# Altium PCB motor_control.PcbDoc
Units mil, origin at the board's own origin, x right, y up, seen from the top; angles counter-clockwise.
Board outline 4802.99 x 3444.88 mil, 2 copper layers (Top Layer, Bottom Layer); 151 components, 95 nets, 426 pads, 81 vias.
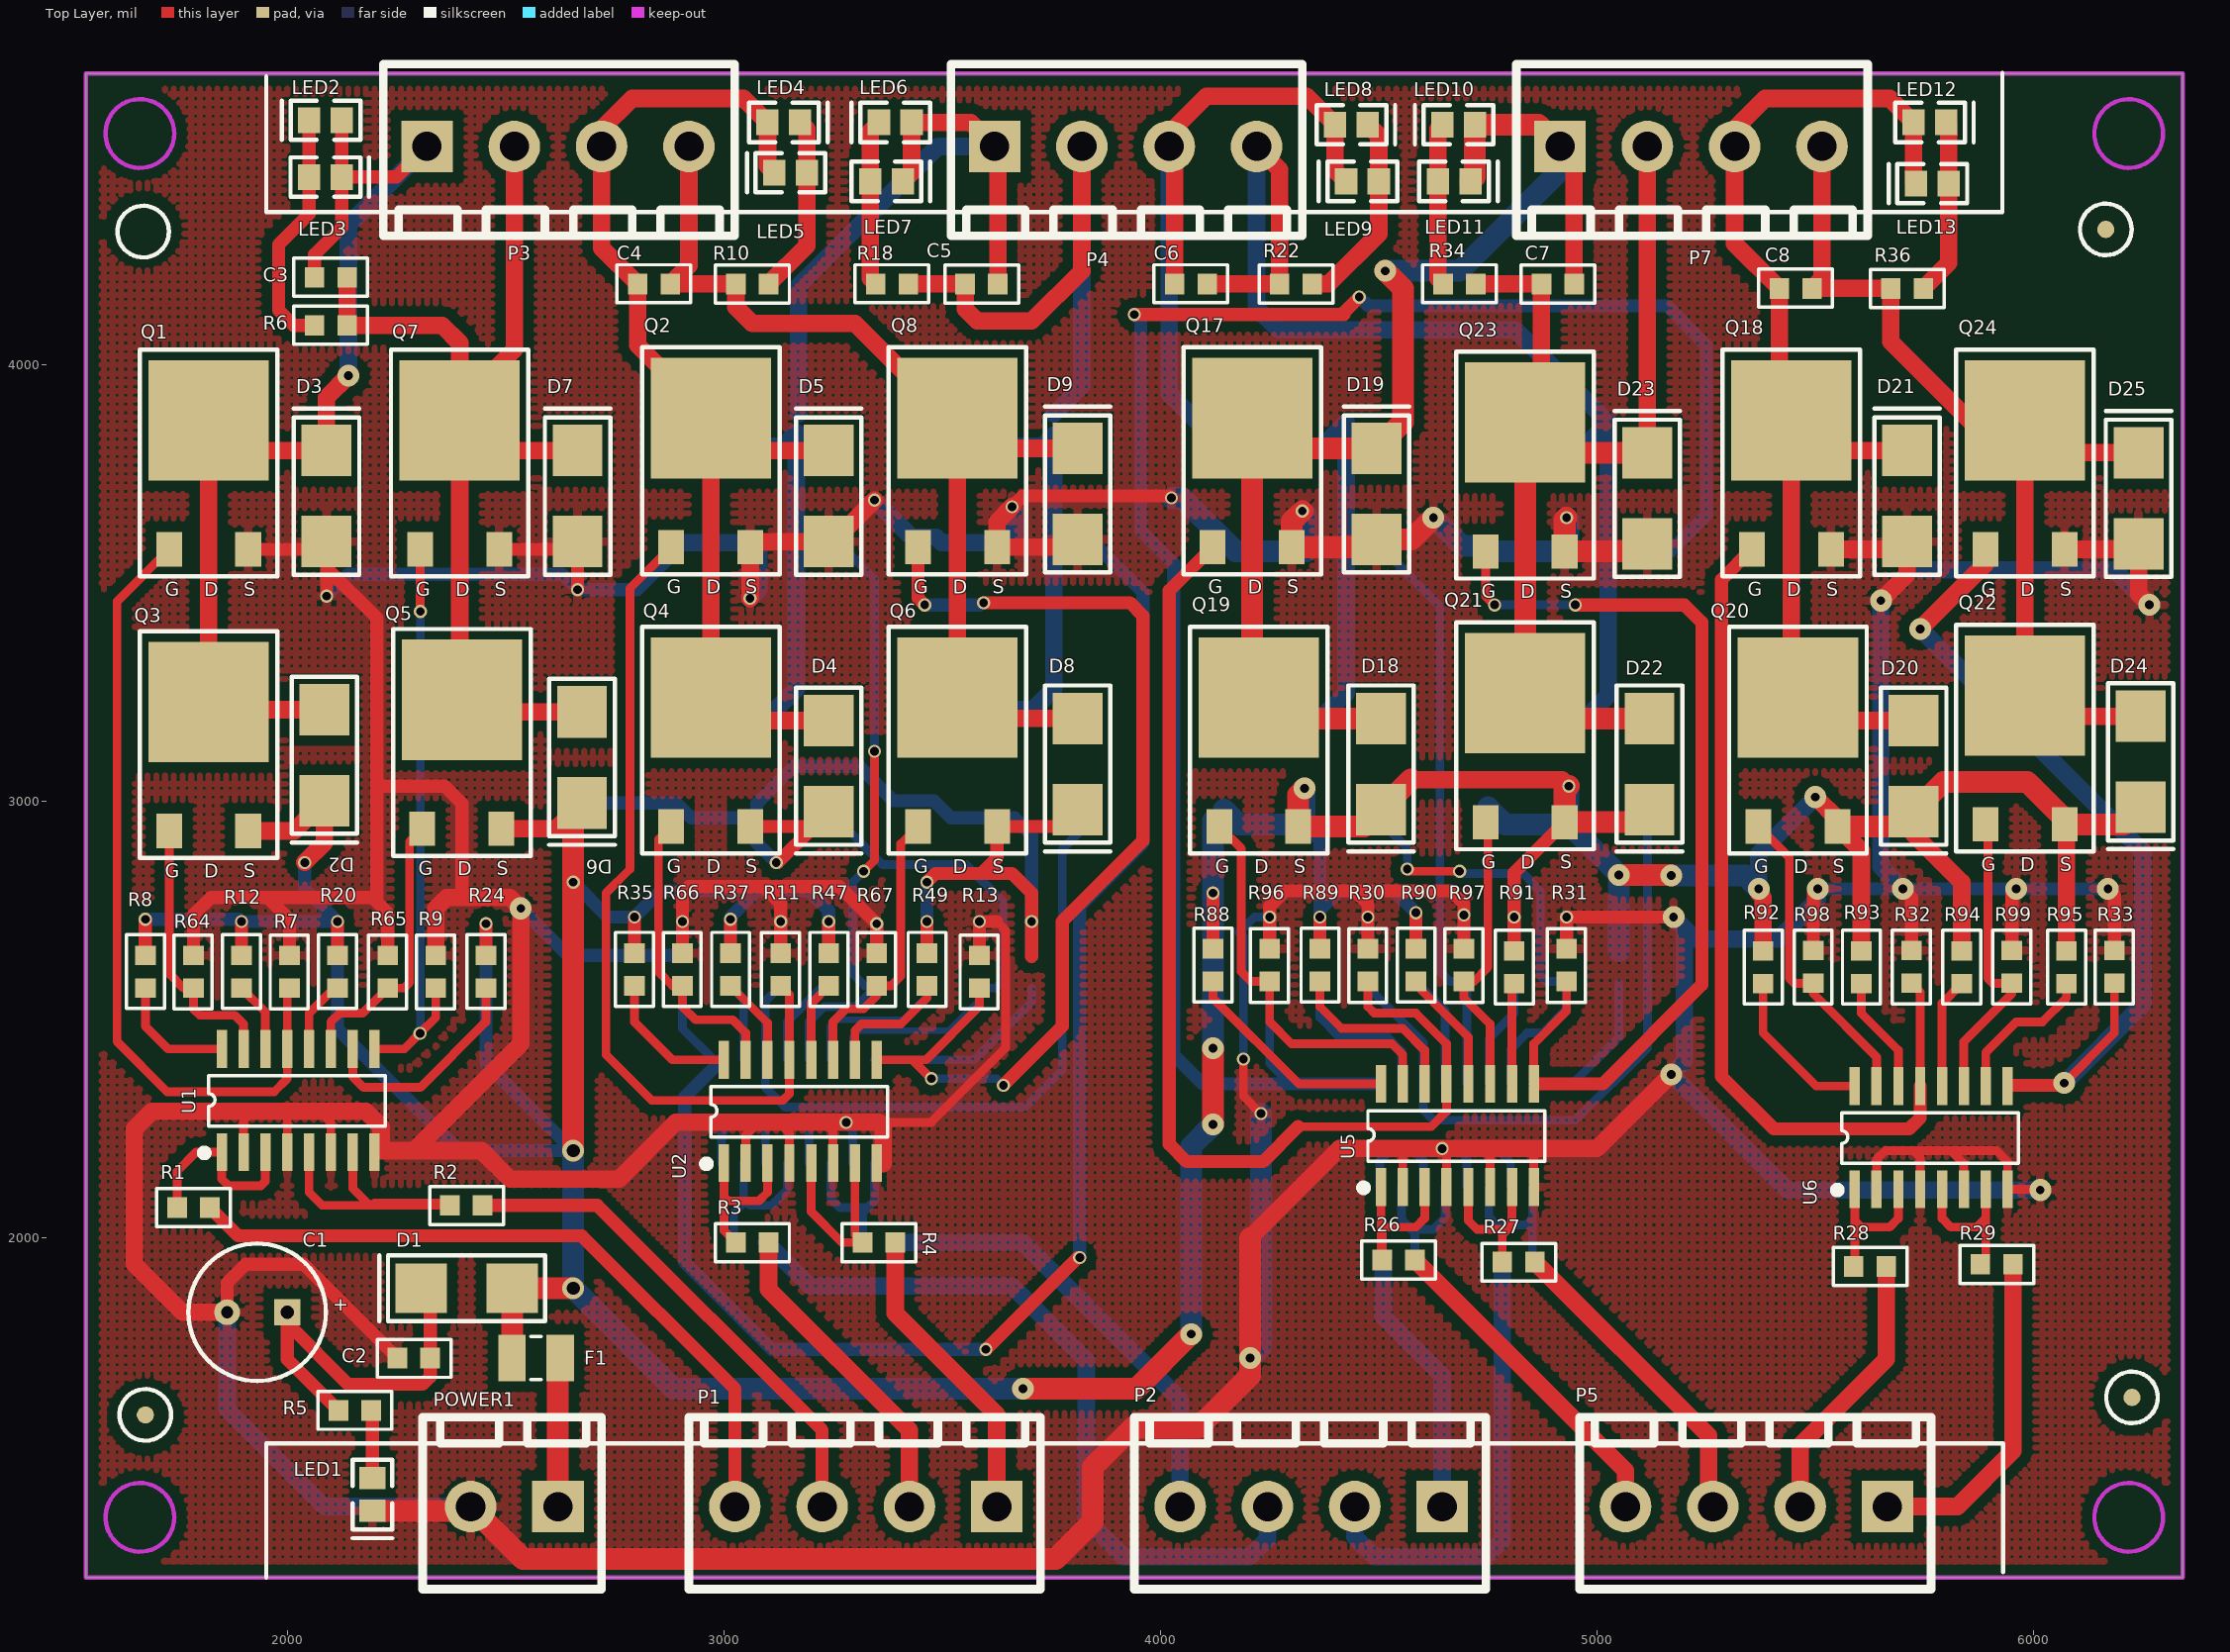
[diagram p0: Top Layer view]
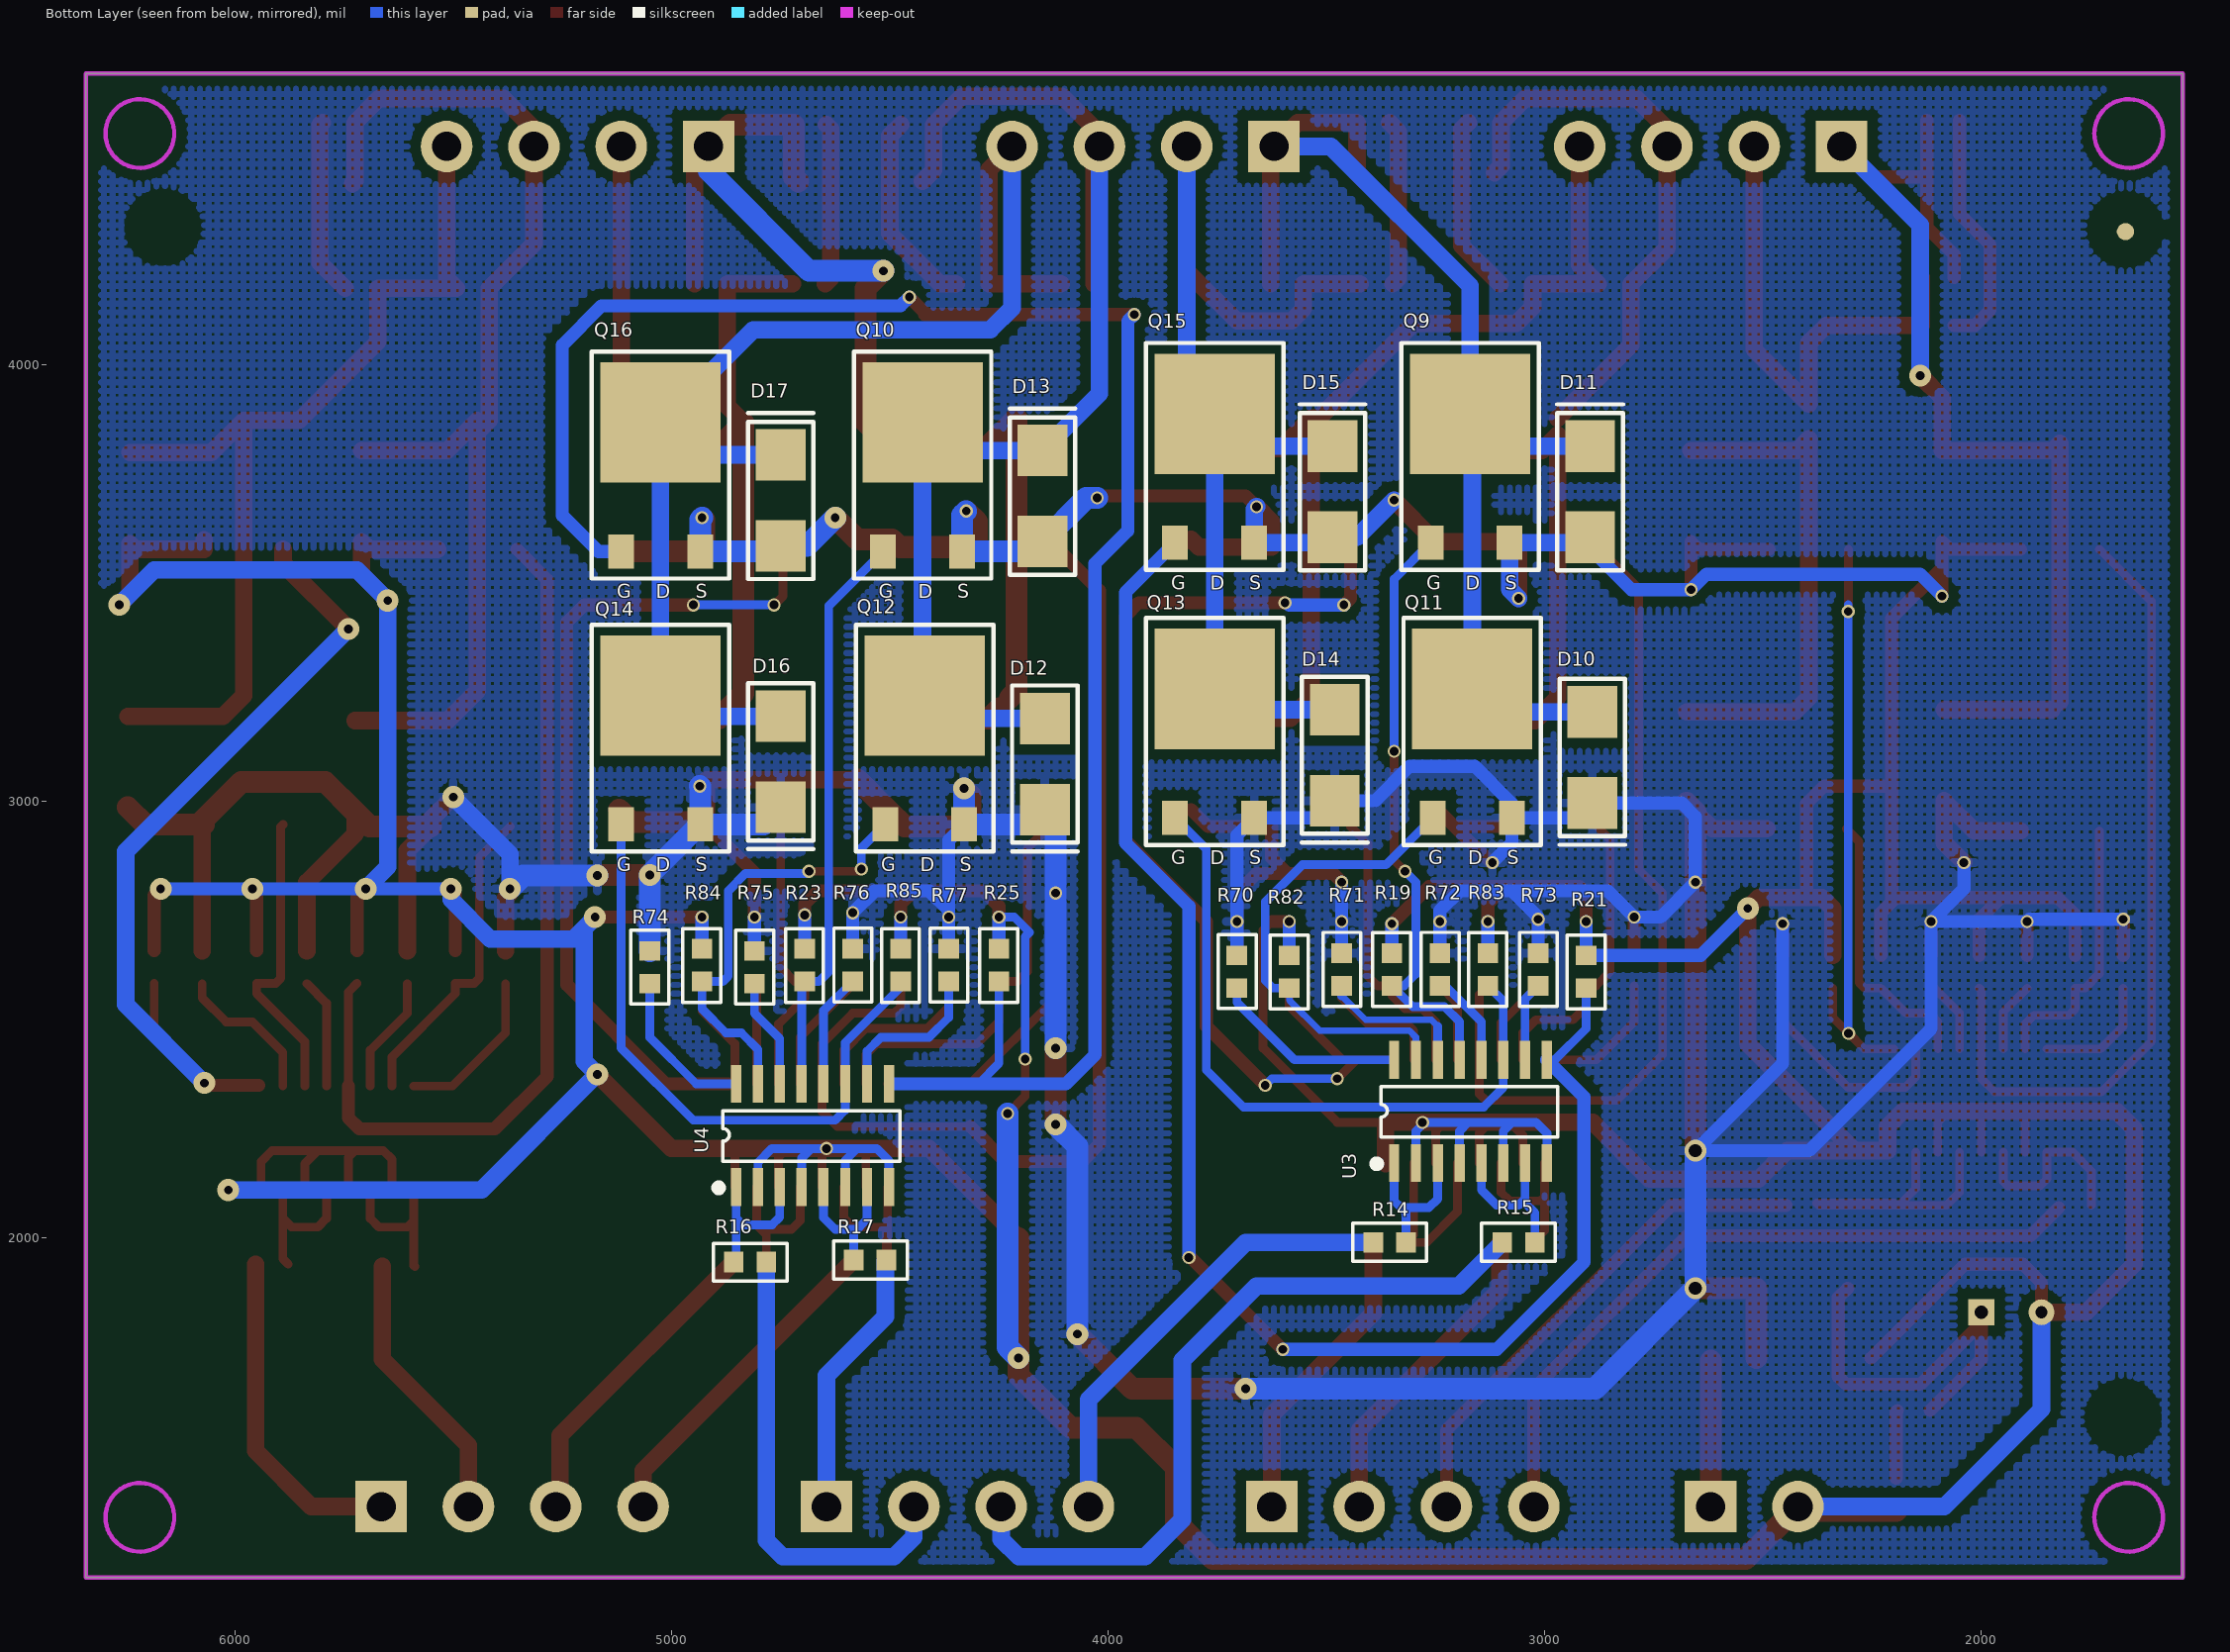
[diagram p1: Bottom Layer view, seen from below]

## Layer stack, top to bottom
Top Solder: solder mask 0.4, Solder Resist, Dk 3.5
Top Layer: signal copper 1.4
Dielectric 1: dielectric 12.6, FR-4, Dk 4.8
Bottom Layer: signal copper 1.4
Bottom Solder: solder mask 0.4, Solder Resist, Dk 3.5

## Board outline
1538.58,1222.56 1538.58,4667.44 6341.57,4667.44 6341.57,1222.56

## Design rules (kind name [scope] priority, off if disabled: settings)
Clearance Clearance_1 [InPolygon] p1: gap=23.62
Clearance [All] p2: gap=10
PolygonConnect [All] p1: connectstyle=Relief reliefconductorwidth=19.68 reliefentries=4 polygonreliefangle="90 Angle" airgapwidth=10
RoutingVias [All] p1: holewidth=28 width=50 viastyle="Through Hole" minholewidth=28 minwidth=50 maxholewidth=28 maxwidth=50
SolderMaskExpansion [All] p1: expansion=4
Width [All] p1: maxlimit=100 minlimit=10 preferedwidth=20
29 further rules are at their usual default settings.

## Components (designator, comment, footprint, x,y, rotation, side; value= is the part's Value field where it differs from the comment)
C1 "Cap Pol3" 220uF 2000,1830 r180 top
C2 "Cap" 0805 2290,1725 r0 top
C3 "Cap" 0805 2100,4200 r180 top
C4 "Cap" 0805 2840,4185 r180 top
C5 "Cap" 0805 3590,4185 r0 top
C6 "Cap" 0805 4070,4185 r180 top
C7 "Cap" 0805 4910,4185 r0 top
C8 "Cap" 0805 5455,4175 r180 top
D1 "1N5822(SS34)" SMA 2515,1885 r180 top
D2 "1N5822(SS34)" SMA 2085,3210 r270 top
D3 "1N5822(SS34)" SMA 2090,3595 r90 top
D4 "1N5822(SS34)" SMA 3240,3185 r270 top
D5 "1N5822(SS34)" SMA 3240,3595 r90 top
D6 "1N5822(SS34)" SMA 2675,3205 r270 top
D7 "1N5822(SS34)" SMA 2665,3595 r90 top
D8 "1N5822(SS34)" SMA 3810,3190 r270 top
D9 "1N5822(SS34)" SMA 3810,3600 r90 top
D10 "1N5822(SS34)" SMA 2891,3205 r270 bottom
D11 "1N5822(SS34)" SMA 2896,3605 r90 bottom
D12 "1N5822(SS34)" SMA 4145,3190 r270 bottom
D13 "1N5822(SS34)" SMA 4150,3595 r90 bottom
D14 "1N5822(SS34)" SMA 3481,3210 r270 bottom
D15 "1N5822(SS34)" SMA 3486,3605 r90 bottom
D16 "1N5822(SS34)" SMA 4750,3195 r270 bottom
D17 "1N5822(SS34)" SMA 4750,3585 r90 bottom
D18 "1N5822(SS34)" SMA 4505,3190 r270 top
D19 "1N5822(SS34)" SMA 4495,3600 r90 top
D20 "1N5822(SS34)" SMA 5725,3185 r270 top
D21 "1N5822(SS34)" SMA 5710,3595 r90 top
D22 "1N5822(SS34)" SMA 5120,3190 r270 top
D23 "1N5822(SS34)" SMA 5115,3590 r90 top
D24 "1N5822(SS34)" SMA 6245,3195 r270 top
D25 "1N5822(SS34)" SMA 6240,3590 r90 top
F1 "Fuse 3A" 3225[1210] 2625,1725 r180 top
LED1 "LED2" LED-0805 2195,1450 r270 top
LED2 "RED" LED-0805 2125,4560 r180 top
LED3 "GRN" LED-0805 2050,4430 r0 top
LED4 "LED2" LED-0805 3100,4555 r0 top
LED5 "LED2" LED-0805 3190,4440 r180 top
LED6 "LED2" LED-0805 3430,4555 r180 top
LED7 "LED2" LED-0805 3335,4420 r0 top
LED8 "LED2" LED-0805 4400,4550 r0 top
LED9 "LED2" LED-0805 4500,4420 r180 top
LED10 "LED2" LED-0805 4720,4550 r180 top
LED11 "LED2" LED-0805 4635,4420 r0 top
LED12 "LED2" LED-0805 5725,4555 r0 top
LED13 "LED2" LED-0805 5805,4415 r180 top
P1 "接PLC" EK508V_PIN4 3625,1385 r180 top locked
P2 "接PLC" EK508V_PIN4 4645,1385 r180 top
P3 "接电机" EK508V_PIN4 2320,4500 r0 top
P4 "接电机" EK508V_PIN4 3620,4500 r0 top
P5 "接PLC" EK508V_PIN4 5665,1385 r180 top
P7 "接电机" EK508V_PIN4 4915,4500 r0 top locked
POWER1 "Header 2" EK508V_PIN2 2520,1385 r180 top
Q1 "FR4105 (NMOS-2)" TO-252 1820,3725 r0 top
Q2 "FR4105 (NMOS-2)" TO-252 2970,3730 r0 top
Q3 "FR5305 (PMOS-2)" TO-252 1820,3080 r0 top
Q4 "FR5305 (PMOS-2)" TO-252 2970,3090 r0 top
Q5 "FR5305 (PMOS-2)" TO-252 2400,3085 r0 top
Q6 "FR5305 (PMOS-2)" TO-252 3535,3090 r0 top
Q7 "FR4105 (NMOS-2)" TO-252 2395,3725 r0 top
Q8 "FR4105 (NMOS-2)" TO-252 3535,3730 r0 top
Q9 "FR4105 (NMOS-2)" TO-252 3171,3740 r180 bottom
Q10 "FR4105 (NMOS-2)" TO-252 4425,3720 r180 bottom
Q11 "FR5305 (PMOS-2)" TO-252 3166,3110 r180 bottom
Q12 "FR5305 (PMOS-2)" TO-252 4420,3095 r180 bottom
Q13 "FR5305 (PMOS-2)" TO-252 3756,3110 r180 bottom
Q14 "FR5305 (PMOS-2)" TO-252 5025,3095 r180 bottom
Q15 "FR4105 (NMOS-2)" TO-252 3756,3740 r180 bottom
Q16 "FR4105 (NMOS-2)" TO-252 5025,3720 r180 bottom
Q17 "FR4105 (NMOS-2)" TO-252 4210,3730 r0 top
Q18 "FR4105 (NMOS-2)" TO-252 5445,3725 r0 top
Q19 "FR5305 (PMOS-2)" TO-252 4225,3090 r0 top
Q20 "FR5305 (PMOS-2)" TO-252 5460,3090 r0 top
Q21 "FR5305 (PMOS-2)" TO-252 4835,3100 r0 top
Q22 "FR5305 (PMOS-2)" TO-252 5980,3095 r0 top
Q23 "FR4105 (NMOS-2)" TO-252 4835,3720 r0 top
Q24 "FR4105 (NMOS-2)" TO-252 5980,3725 r0 top
R1 "Res2" 0805 1785,2070 r0 top
R2 "Res2" 0805 2410,2075 r0 top
R3 "Res2" 0805 3065,1990 r0 top
R4 "Res2" 0805 3355,1990 r0 top
R5 "Res2" 0805 2155,1605 r180 top
R6 "Res2" 0805 2100,4090 r180 top
R7 "Res2" 0805 2005,2610 r270 top
R8 "Res2" 0805 1675,2610 r90 top
R9 "Res2" 0805 2340,2610 r270 top
R10 "Res2" 0805 3065,4185 r0 top
R11 "Res2" 0805 3130,2615 r270 top
R12 "Res2" 0805 1895,2610 r90 top
R13 "Res2" 0805 3585,2610 r270 top
R14 "Res2" 0805 3355,1990 r0 bottom
R15 "Res2" 0805 3060,1990 r0 bottom
R16 "Res2" 0805 4820,1945 r180 bottom
R17 "Res2" 0805 4545,1950 r180 bottom
R18 "Res2" 0805 3385,4185 r180 top
R19 "Res2" 0805 3350,2615 r270 bottom
R20 "Res2" 0805 2115,2610 r90 top
R21 "Res2" 0805 2905,2610 r270 bottom
R22 "Res2" 0805 4310,4185 r0 top
R23 "Res2" 0805 4695,2625 r270 bottom
R24 "Res2" 0805 2455,2610 r90 top
R25 "Res2" 0805 4250,2625 r270 bottom
R26 "Res2" 0805 4545,1950 r0 top
R27 "Res2" 0805 4820,1945 r0 top
R28 "Res2" 0805 5625,1935 r0 top
R29 "Res2" 0805 5915,1940 r0 top
R30 "Res2" 0805 4475,2625 r270 top
R31 "Res2" 0805 4930,2625 r270 top
R32 "Res2" 0805 5720,2621 r270 top
R33 "Res2" 0805 6185,2621 r270 top
R34 "Res2" 0805 4685,4185 r180 top
R35 "Res2" 0805 2795,2615 r90 top
R36 "Res2" 0805 5710,4175 r0 top
R37 "Res2" 0805 3015,2615 r90 top
R47 "Res2" 0805 3240,2615 r90 top
R49 "Res2" 0805 3465,2615 r90 top
R64 "Res2" 0805 1785,2610 r270 top
R65 "Res2" 0805 2230,2610 r270 top
R66 "Res2" 0805 2905,2615 r270 top
R67 "Res2" 0805 3350,2615 r270 top
R70 "Res2" 0805 3705,2610 r90 bottom
R71 "Res2" 0805 3465,2615 r90 bottom
R72 "Res2" 0805 3240,2615 r90 bottom
R73 "Res2" 0805 3015,2615 r90 bottom
R74 "Res2" 0805 5050,2620 r90 bottom
R75 "Res2" 0805 4810,2620 r90 bottom
R76 "Res2" 0805 4585,2625 r90 bottom
R77 "Res2" 0805 4365,2625 r90 bottom
R82 "Res2" 0805 3585,2610 r270 bottom
R83 "Res2" 0805 3130,2615 r270 bottom
R84 "Res2" 0805 4930,2625 r270 bottom
R85 "Res2" 0805 4475,2625 r270 bottom
R88 "Res2" 0805 4120,2625 r90 top
R89 "Res2" 0805 4365,2625 r90 top
R90 "Res2" 0805 4585,2625 r90 top
R91 "Res2" 0805 4810,2620 r90 top
R92 "Res2" 0805 5380,2620 r90 top
R93 "Res2" 0805 5605,2620 r90 top
R94 "Res2" 0805 5835,2620 r90 top
R95 "Res2" 0805 6075,2620 r90 top
R96 "Res2" 0805 4250,2625 r270 top
R97 "Res2" 0805 4695,2625 r270 top
R98 "Res2" 0805 5495,2621 r270 top
R99 "Res2" 0805 5950,2621 r270 top
U1 "TLP280-4" SO16 2025,2315 r90 top
U2 "TLP280-4" SO16 3175,2290 r90 top
U3 "TLP280-4" SO16 3170,2290 r90 bottom
U4 "TLP280-4" SO16 4677.02,2235 r90 bottom
U5 "TLP280-4" SO16 4680,2235 r90 top
U6 "TLP280-4" SO16 5765,2230 r90 top

## Footprints (in the part's own frame and the unit in brackets; to place one, negate y for a bottom-side part, rotate by r counter-clockwise, add the part's x,y. Pads: shape width x height; smd on the part's side, far side on the other; paste and mask are expansions set on the pad)
220uF [mm]
  rect 1.524x1.524 hole 0.762: 1(0,0)
  round 1.5 hole 0.7: 2(3.5,0)
  silkscreen extent -2.25,-4 5.75,4
0805 [mm] "1.14mm,1.2mm,3.05mm"
  rect 1.14x1.2 smd: 1(-0.95,0) 2(0.95,0)
  silkscreen extent -2.13,-1.12 2.16,1.09
3225[1210] [mm] "Chip Resistor; Body 3.2 x 2.5 mm (LxW typ)"
  rect 1.6x2.7 smd: 1(0,0) 2(2.8,0)
  silkscreen extent 1.1,-1.25 1.7,1.25
EK508V_PIN2 [mm]
  rect 3x3 hole 1.7: 1(-2.54,0)
  round 3 hole 1.7: 2(2.54,0)
  silkscreen extent -5.08,-5.2 5.33,4.8
EK508V_PIN4 [mm]
  rect 3x3 hole 1.7: 1(0,0)
  round 3 hole 1.7: 2(5.08,0) 3(10.16,0) 4(15.24,0)
  silkscreen extent -2.54,-5.2 17.91,4.8
LED-0805 [mm]
  rect 1.3x1.5 smd: 1(0,0) 2(1.9,0)
  silkscreen extent -1.08,-1.14 3.49,1.14
SMA [mm]
  rect 3x2.9 smd: 1(0,0) 2(5.3,0)
  silkscreen extent -1.92,-1.91 7.73,1.91
SO16 [mm] "Wide = 6mm"
  rect 2.2x0.6 smd: 1(-3,4.445) 2(-3,3.175) 3(-3,1.905) 4(-3,0.635) 5(-3,-0.635) 6(-3,-1.905) 7(-3,-3.175) 8(-3,-4.445) 9(3,-4.445) 10(3,-3.175) 11(3,-1.905) 12(3,-0.635) 13(3,0.635) 14(3,1.905) 15(3,3.175) 16(3,4.445)
  silkscreen extent -3.23,-5.08 1.45,5.64
TO-252 [mm]
  rect 1.5x2 smd: 1(-2.3,-3.75) 3(2.3,-3.75)
  rect 7x7 smd: 2(0,3.75)
  silkscreen extent -4,-5.32 4,7.87

## Part data
C1: "Polarized Capacitor (Surface Mount)"
C2 C3 C4 C5 C6 C7 C8: "Capacitor"
D1 D2 D3 D4 D5 D6 D7 D8 D9 D10 D11 D12 D13 D14 D15 D16 D17 D18 D19 D20 D21 D22 D23 D24 D25: library part "Diode 1N4148", "High Conductance Fast Diode"
F1: library part "Fuse 1", "Fuse"
LED1 LED4 LED5 LED6 LED7 LED8 LED9 LED10 LED11 LED12 LED13: "Typical RED, GREEN, YELLOW, AMBER GaAs LED"
LED2 LED3: library part LED2, "Typical RED, GREEN, YELLOW, AMBER GaAs LED"
P1 P2 P3 P4 P5 P7: library part "Header 4", "Header, 4-Pin"
POWER1: "Header, 2-Pin"
Q1 Q2 Q7 Q8 Q9 Q10 Q15 Q16 Q17 Q18 Q23 Q24: library part NMOS-2, "N-Channel Power MOSFET"
Q3 Q4 Q5 Q6 Q11 Q12 Q13 Q14 Q19 Q20 Q21 Q22: library part PMOS-2, "P-Channel Power MOSFET"
R1 R2 R3 R4 R5 R6 R7 R8 R9 R10 R11 R12 R13 R14 R15 R16 R17 R18 R19 R20 R21 R22 R23 R24 R25 R26 R27 R28 R29 R30 R31 R32 R33 R34 R35 R36 R37 R47 R49 R64 R65 R66 R67 R70 R71 R72 R73 R74 R75 R76 R77 R82 R83 R84 R85 R88 R89 R90 R91 R92 R93 R94 R95 R96 R97 R98 R99: "Resistor"
U1 U2 U3 U4 U5 U6: library part TLP521-4

## Free pads (board coordinates)
  round 39.37 smd: 0(1675,1595) 0(6165,4310) 0(6225,1635)
  round 39.37 smd far side: 4(1670,4305)

## Via types
v1: diameter 30, hole 20, Top Layer to Bottom Layer, 54 vias
v2: diameter 50, hole 20, Top Layer to Bottom Layer, 25 vias
v3: diameter 50, hole 30, Top Layer to Bottom Layer, 2 vias

## Nets (pads, with @x,y where several pads share a name; then routed paths per layer and width w, separated by ;. In a path a pad name is that pad's centre, name@x,y a point inside that pad or via, vN(x,y) a via of type N, cw(c..) or ccw(c..) an arc to the next point about the centre after c; other vN are vias at no path point)
+24V: D1.1 D2.2 D4.2 D6.2 D8.2 D10.2 D12.2 D14.2 D16.2 D18.2 D20.2 D22.2 D24.2 F1.2 Q3.3 Q4.3 Q5.3 Q6.3 Q11.3 Q12.3 Q13.3 Q14.3 Q19.3 Q20.3 Q21.3 Q22.3 R8.2 R12.2 R20.2 R24.2 R35.2 R37.2 R47.2 R49.2 R70.2 R71.2 R72.2 R73.2 R74.2 R75.2 R76.2 R77.2 R88.2 R89.2 R90.2 R91.2 R92.2 R93.2 R94.2 R95.2 | length 17285.7
  Top Layer w30: R8.2 v1(1675,2730) ; R12.2 v1(1895,2725) ; R20.2 v1(2115,2725) ; R24.2 v1(2455,2720) ; F1.2 F1.2@2515,1725.24 ; R35.2 v1(2795,2735) ; R37.2 v1(3015,2730) ; Q4.3 D4.2@3206.02,2942.36 ; v1(3120,2860) 3123.66,2860 D4.2@3206.02,2942.36 ; R47.2 v1(3240,2725) ; D4.2 D4.2@3206.02,2942.36 ; R49.2 v1(3465,2725) ; v1(3465,2815) 3485,2835 3590,2835 ; 3705,2645 v1(3705,2725) 3705,2790 3660,2835 3590,2835 ; D8.2 3771.02,2942.36 Q6.3 3625.55,2870.55 3590,2835 ; R88.2 v1(4120,2790) ; R89.2 v1(4365,2735) ; R90.2 v1(4585,2745) ; R91.2 v1(4810,2735) 4810,2836.81 Q21.3
  Top Layer w40: Q3.3 2016.02,2932.36 D2.2 2085,2905 v1(2040,2860) ; Q5.3 2616.02,2937.36 D6.2@2655,2976.34 ; 4573.66,3050 4920,3050 v1(4935,3035) ; v2(5370,2800) 5370,2790 5380,2780 R92.2 ; v2(5500,3010) 5550.55,2959.45 Q20.3 5605,2887.91 R93.2 ; D20.2 5725,2925 5835,2815 R94.2 ; R95.2 Q22.3@6075,2942.91
  Top Layer w50: F1.2@2515,1725.24 D1.1 v3(2655,1885) ; v3(2655,2200) v1(2655,2815) 2655,2976.34 D6.2 ; v2(3685,1655) 3945,1655 v2(4070,1780) ; v2(4120,2260) v2(4120,2435) ; v2(4330,3030) 4315.55,3015.55 Q19.3 4466.02,2942.36 D18.2 4573.66,3050 ; v1(4935,3035) 4925.55,3025.55 Q21.3 5091.02,2952.36 D22.2 ; v2(5050,2831.81) 5168.19,2831.81 v2(5170,2830) ; Q20.3 5691.02,2942.36 D20.2 5793.66,3045 5985,3045 6070.55,2959.45 Q22.3 ; Q22.3@6075,2942.91 Q22.3 ; D24.2 6206.02,2947.36 Q22.3
  Bottom Layer w30: v1(1675,2730) 1890,2730 v1(1895,2725) v1(2115,2725) ; v1(2040,2860) 2040,2800 v1(2115,2725) ; v1(2455,2720) 2455,2400 v3(2655,2200) 2395,2200 2115,2480 v1(2115,2725) ; R73.2 v1(3015,2730) 3015,2735 3075,2795 ; v1(3120,2860) 3075.45,2904.55 Q11.3 ; R72.2 v1(3240,2725) 3240,2750 3195,2795 3075,2795 ; R71.2 v1(3465,2725) v1(3465,2815) ; R70.2 v1(3705,2725) 3705,2922.81 Q13.3 3519.98,2962.36 D14.2 3388.66,3001.34 3310,3080 3160,3080 3075.45,2995.45 Q11.3 ; D12.2@4120,2956.34 D12.2 ; Q12.3 4365,2911.81 4365,2750 ; R77.2 v1(4365,2735) 4365,2750 ; R76.2 v1(4585,2745) 4535,2795 4410,2795 4365,2750 ; R75.2 v1(4810,2735) ; 3075,2795 2855,2795 v1(2795,2735) 2735,2735 v1(2655,2815) 2655,2965 2686.34,2996.34 D10.2 2924.98,2962.36 Q11.3
  Bottom Layer w40: v2(5370,2800) 5370,2880 v2(5500,3010)
  Bottom Layer w50: v3(2655,2200) v3(2655,1885) 2885,1655 v2(3685,1655) ; v2(4070,1780) 4070,2210 v2(4120,2260) ; v2(4120,2435) v1(4120,2790) D12.2@4120,2956.34 ; D12.2 4178.98,2947.36 Q12.3 4329.45,3029.45 v2(4330,3030) ; D16.2 4788.98,2947.36 Q14.3 ; v1(4935,3035) 4934.45,3034.45 Q14.3 ; R74.2 v2(5050,2831.81) Q14.3 ; v2(5170,2830) 5340,2830 v2(5370,2800)
+24VIN: F1.1 POWER1.1 | length 342.1
  Top Layer w30: F1.1@2620,1720 F1.1
  Top Layer w50: POWER1.1 F1.1@2620,1720
A1: C3.2 D2.1 D3.2 LED2.1 LED3.2 P3.1 Q1.2 Q3.2 | length 2543.1
  Top Layer w30: Q3.2 Q3.2@1837.64,3210 ; C3.2 2062.6,4252.6 2124.8,4314.8 LED3.2 ; LED2.1 2124.8,4559.8 LED3.2 ; P3.1 2250,4430 LED3.2
  Top Layer w40: Q3.2 1820,3820 1836.34,3803.66 D3.2 2090,3925 v2(2140,3975) ; Q3.2@1837.64,3210 D2.1
  Bottom Layer w40: v2(2140,3975) 2140,4320 P3.1
A2: C4.2 D4.1 D5.2 LED4.1 LED5.2 P3.3 Q2.2 Q4.2 | length 2498.2
  Top Layer w40: Q2.2 2802.6,4045.04 C4.2 2720,4267.6 P3.3 2720,4540 2790,4610 3045,4610 LED4.1 3100,4455.2 LED5.2 ; D4.1 3022.64,3185 Q4.2 2970,3840 3006.34,3803.66 D5.2
A3: C5.2 D10.1 D11.2 LED6.1 LED7.2 P4.1 Q9.2 Q11.2 | length 2715.9
  Top Layer w40: LED7.2 3430,4440.2 LED6.1 3565,4555 P4.1 3627.4,4492.6 C5.2
  Bottom Layer w40: D10.1 3113.36,3205 Q11.2 3166,3845 3134.66,3813.66 D11.2 ; Q9.2 3171,4181 3490,4500 P4.1
A4: C6.2 D12.1 D13.2 LED8.1 LED9.2 P4.3 Q10.2 Q12.2 | length 2908.3
  Top Layer w40: C6.2 4032.6,4487.4 P4.3 4020,4530 4105,4615 4335,4615 LED8.1 4400,4445.2 LED9.2
  Bottom Layer w40: P4.3 4020,3933.66 D13.2 4361.02,3803.66 Q10.2 4425,3247.64 Q12.2 4367.36,3190 D12.1
A5: C7.2 D18.1 D19.2 LED10.1 LED11.2 P7.1 Q17.2 Q19.2 | length 2902.2
  Top Layer w40: P7.1 4947.4,4467.6 C7.2
  Top Layer w50: Q19.2 4210,3252.64 Q17.2 4278.98,3808.66 D19.2 4555,3868.66 4555,4175 v2(4515,4215) ; Q19.2@4248.82,3213.82 4272.64,3190 D18.1 ; LED11.2 4720,4430.2 LED10.1 4865,4550 P7.1
  Bottom Layer w50: v2(4515,4215) 4685,4215 4915,4445 P7.1
A6: C8.2 D20.1 D21.2 LED12.1 LED13.2 P7.3 Q18.2 Q20.2 | length 2574.4
  Top Layer w40: D21.2 5513.98,3803.66 Q18.2 Q18.2@5445,3845 ; D20.1 5512.64,3185 Q20.2 5445,3252.64 Q18.2@5445,3845 ; LED13.2 5725,4420.2 LED12.1 5670,4610 5385,4610 5315,4540 P7.3 5315,4277.6 C8.2 5417.6,3872.4 Q18.2@5445,3845
B1: C3.1 D6.1 D7.2 P3.2 Q5.2 Q7.2 R6.1 | length 2332.7
  Top Layer w40: C3.1 R6.1 2355,4090 2395,4050 2395,3910 2520,4035 P3.2 ; D7.2 2421.34,3803.66 2395,3830 2395,3237.64 Q5.2 2427.64,3205 D6.1
B2: C4.1 D8.1 D9.2 P3.4 Q6.2 Q8.2 R10.1 | length 2386.7
  Top Layer w40: P3.4 2920,4227.6 C4.1 R10.1 3027.6,4132.4 3065,4095 3300,4095 3517.36,3877.64 Q8.2 ; D8.1 3582.64,3190 Q6.2 Q8.2 ; D9.2 3603.98,3808.66 Q8.2
B3: C5.1 D14.1 D15.2 P4.2 Q13.2 Q15.2 R18.1 | length 2596.1
  Top Layer w40: R18.1 C5.1 3552.6,4127.4 3580,4100 3705,4100 3820,4215 P4.2
  Bottom Layer w40: D14.1 3708.36,3210 Q13.2 3756,3840 3729.66,3813.66 D15.2 ; Q15.2 3820,3951.64 P4.2
B4: C6.1 D16.1 D17.2 P4.4 Q14.2 Q16.2 R22.1 | length 3011
  Top Layer w40: C6.1 R22.1 4272.6,4447.4 P4.4
  Bottom Layer w40: P4.4 4220,4130 4270,4080 4812.64,4080 Q16.2 ; D16.1 4977.36,3195 Q14.2 Q16.2 ; D17.2 4951.02,3793.66 Q16.2
B5: C7.1 D22.1 D23.2 P7.2 Q21.2 Q23.2 R34.1 | length 2421.9
  Top Layer w40: R34.1 C7.1 4872.6,3905.24 Q23.2 ; D23.2 P7.2
  Top Layer w50: D23.2 4903.98,3798.66 Q23.2 Q21.2 4892.64,3190 D22.1
B6: C8.1 D24.1 D25.2 P7.4 Q22.2 Q24.2 R36.1 | length 2224.4
  Top Layer w40: P7.4 5515,4197.6 C8.1 R36.1 5672.6,4052.4 5852.36,3872.64 Q24.2 ; D25.2 6053.98,3798.66 Q24.2 ; D24.1 6027.64,3195 Q22.2 Q24.2
GND: C1.2 C2.1 D3.1 D5.1 D7.1 D9.1 D11.1 D13.1 D15.1 D17.1 D19.1 D21.1 D23.1 D25.1 LED1.2 POWER1.2 Q1.3 Q2.3 Q7.3 Q8.3 Q9.3 Q10.3 Q15.3 Q16.3 Q17.3 Q18.3 Q23.3 Q24.3 R7.1 R9.1 R11.1 R13.1 R19.1 R21.1 R23.1 R25.1 R30.1 R31.1 R32.1 R33.1 R64.1 R65.1 R66.1 R67.1 R82.1 R83.1 R84.1 R85.1 R96.1 R97.1 R98.1 R99.1 U1.2 U1.4 U1.6 U1.8 U2.2 U2.4 U2.6 U2.8 U3.2 U3.4 U3.6 U3.8 U4.2 U4.4 U4.6 U4.8 U5.2 U5.4 U5.6 U5.8 U6.2 U6.4 U6.6 U6.8 | length 28616.2
  Top Layer w20: U1.2 1900,2270 1920,2290 ; 1985,2290 2000,2275 U1.4 ; 2075,2290 2100,2265 U1.6 ; U2.2 3050,2235 3080,2265 ; 3125,2265 3150,2240 U2.4 ; 3230,2265 3250,2245 U2.6 ; 3355,2265 3475,2265 3645,2435 3645,2705 3625,2725 ; v1(4190,2410) 4190,2325 v1(4230,2285) ; U5.2 4555,2190 4570,2205 ; U5.4 4655,2190 ; 4735,2205 4755,2185 U5.6 ; 4840,2205 4855,2190 U5.8 ; U6.2 5640,2180 5660,2200 5725,2200 ; U6.4 5740,2185 5725,2200 ; U6.6 5840,2170 5810,2200 ; v2(6015,2110) 6013.11,2111.89 U6.8 5940,2175 5915,2200 5810,2200 ; 5725,2200 5810,2200
  Top Layer w30: R64.1 1785,2740 1825,2780 1955,2780 ; C1.2 1862.2,1897.2 1905,1940 2037.6,1940 C2.1 ; Q1.3 2072.36,3577.36 D3.1 2090,3535 ; R7.1 2005,2730 1955,2780 ; v1(2090,3470) 2090,3535 ; 2205,2780 2205,3035 ; R65.1 2230,2745 2195,2780 1955,2780 ; 2400,2780 2400,2995 2360,3035 2205,3035 ; POWER1.2@2410.2,1375.2 POWER1.2 ; Q7.3 2647.36,3577.36 D7.1 v1(2665,3485) ; R66.1 v1(2905,2725) 2905,2790 2920,2805 3090,2805 ; R11.1 v1(3130,2725) 3130,2765 3090,2805 ; R67.1 v1(3350,2720) 3265,2805 3090,2805 ; R13.1 v1(3585,2725) 3625,2725 ; v1(3660,3675) 3685,3700 4020,3700 v1(4025,3695) ; R96.1 v1(4250,2735) 4250,2760 4285,2795 4445,2795 ; R30.1 v1(4475,2735) 4475,2765 4445,2795 ; R97.1 v1(4695,2740) 4695,2765 4665,2795 4445,2795 ; R31.1 v1(4930,2735) v2(5175,2735) v2@5185,2735 ; R98.1 5495,2790 v2(5505,2800) ; v2(5700,2800) 5720,2780 R32.1 ; R99.1 5950,2790 v2(5960,2800) ; v2(6170,2800) 6185,2785 R33.1 ; 2090,3535 2205,3420 2205,3035
  Top Layer w40: C1.2 1760,1830 1650,1940 1650,2250 1690,2290 1920,2290 1985,2290 2075,2290 2180,2290 2215,2255 2215,2200 2290,2200 ; R9.1 2340,2755 2365,2780 2400,2780 2510,2780 v2(2535,2755) 2535,2445 2290,2200 ; v1(3060,3465) 3060.55,3465.55 Q2.3 3073.19,3595 D5.1 3250,3595 v1(3345,3690) ; 3365,2170 3365,2255 3355,2265 v1(3280,2265) 3230,2265 3125,2265 3080,2265 2890,2265 2760,2135 2510,2135 2445,2200 2290,2200 ; v1(3660,3675) 3625.55,3640.55 Q8.3 3792.36,3582.36 D9.1 ; 4205,2000 4410,2205 4570,2205 v1(4645,2205) 4735,2205 4840,2205 5000,2205 v2(5170,2375) ; D23.1@5097.36,3572.36 D23.1 ; Q18.3 5692.36,3577.36 D21.1 5710,3520 v2(5650,3460) ; Q24.3@6070.55,3599.45 Q24.3 6227.36,3577.36 D25.1 6240,3475 v2(6265,3450)
  Top Layer w50: LED1.2 POWER1.2@2410.2,1375.2 ; POWER1.2 2540,1265 3760,1265 3845,1350 3845,1475 3935,1565 4085,1565 4205,1685 v2(4205,1725) 4205,2000 ; v1(4325,3665) 4300.55,3640.55 Q17.3 4477.36,3582.36 D19.1 4575,3600 v2(4625,3650) ; v1(4930,3650) 4925.55,3645.55 Q23.3 D23.1@5097.36,3572.36
  Bottom Layer w20: U3.8 2995,2240 3020,2265 3075,2265 ; U3.6 3095,2245 3075,2265 ; U3.4 3195,2245 3175,2265 ; v1@3275,2265 3175,2265 ; v1@3277.5,2262.5 3295,2245 U3.2 ; v1(4190,2410) 4190,2690 4180,2700 4215,2735 v1(4250,2735) ; U4.8 4502.02,2177.02 4530,2205 4575,2205 ; U4.6 4602.02,2177.98 4575,2205 ; U4.4 4702.02,2182.98 4680,2205 ; U4.2 4802.02,2172.98 4770,2205 4680,2205 ; 3075,2265 3175,2265 ; 4575,2205 v1(4645,2205) 4680,2205
  Bottom Layer w30: v1(2090,3470) 2140,3520 2630,3520 v1(2665,3485) 2801.28,3485 D11.1@2908.64,3592.36 ; v2(2535,2755) 2642.6,2647.4 R21.1 v1(2905,2725) ; R83.1 v1(3130,2725) ; R19.1 v1(3350,2720) ; R82.1 v1(3585,2725) ; R25.1 v1(4250,2735) ; R85.1 v1(4475,2735) ; R23.1 v1(4695,2740) ; R84.1 v1(4930,2735) ; v2(5505,2800) v2(5700,2800) v2(5960,2800) v2(6170,2800)
  Bottom Layer w40: C1.2 1862.2,1607.8 2085,1385 POWER1.2 ; D11.1@2908.64,3592.36 Q9.3 3080.45,3485.45 v1(3060,3465) ; v1(3345,3690) 3430,3605 D15.1 3498.64,3592.36 Q15.3 3665.45,3669.55 v1(3660,3675) ; v2(5175,2735) 5200,2710 ; v2(5505,2800) 5505,2775 5415,2685 5225,2685 5200,2710 ; v2(5700,2800) 5650,2850 v2(5650,3460) 5720,3530 6185,3530 v2(6265,3450) ; v2(6015,2110) 5435,2110 v2(5170,2375) 5200,2405 5200,2710
  Bottom Layer w50: v1(4025,3695) 4050,3695 D13.1 4172.64,3572.36 Q10.3 4334.45,3655.55 v1(4325,3665) ; v2(4205,1725) 4230,1750 v1(4230,2285) ; v2(4625,3650) 4690,3585 D17.1 4762.64,3572.36 Q16.3 4934.45,3645.55 v1(4930,3650)
M1A: P1.4 R1.2 | length 1644.5
  Top Layer w30: R1.2 1887.4,2005 2675,2005 3025,1655 P1.4
M1B: P1.3 R2.2 | length 1165.9
  Top Layer w30: R2.2 2710,2075 3225,1560 P1.3
M2A: P1.2 R3.2 | length 738.6
  Top Layer w40: R3.2 3102.4,1882.6 3425,1560 P1.2
M2B: P1.1 R4.2 | length 701.3
  Top Layer w40: R4.2 3392.4,1827.6 3625,1595 P1.1
M3A: P2.4 R14.2 | length 1046.7
  Bottom Layer w40: R14.2 3685,1990 4045,1630 P2.4
M3B: P2.3 R15.2 | length 1751.2
  Bottom Layer w40: R15.2 3197.4,1890 3660,1890 3830,1720 3830,1355 3915,1270 4205,1270 4245,1310 P2.3
M4A: P2.2 R16.2 | length 1079.2
  Bottom Layer w40: P2.2 4445,1315 4490,1270 4745,1270 4782.6,1307.6 R16.2
M4B: P2.1 R17.2 | length 621.9
  Bottom Layer w40: R17.2 4510,1947.6 4510,1820 4645,1685 P2.1
M5A: P5.4 R26.2 | length 764.9
  Top Layer w40: R26.2 5065,1467.4 P5.4
M5B: P5.3 R27.2 | length 728.8
  Top Layer w40: R27.2 5255,1547.4 5255,1395 P5.3
M6A: P5.2 R28.2 | length 631.8
  Top Layer w40: P5.2 5465,1525 5662.4,1722.4 R28.2
M6B: P5.1 R29.2 | length 767.8
  Top Layer w40: P5.1 5825,1385 5952.4,1512.4 R29.2
NetC1_1: C1.1 C2.2 D1.2 R5.2 | length 877.6
  Top Layer w30: C1.1 C1.1@2000,1805 ; R5.2 2000,1722.6 C1.1@2000,1805 ; D1.2 2327.4,1863.94 C2.2 2327.4,1682.4 2310,1665 2140,1665 C1.1@2000,1805
NetLED1_1: LED1.1 R5.1 | length 156.1
  Top Layer w30: R5.1 2195,1602.4 LED1.1
NetLED2_2: LED2.2 LED3.1 R6.2 | length 561.2
  Top Layer w30: LED2.2 2050.2,4430.2 LED3.1 2050,4345 1980,4275 1980,4125 2015,4090 R6.2
NetLED4_2: LED4.2 LED5.1 R10.2 | length 412.6
  Top Layer w40: R10.2 3190,4272.6 LED5.1 3190,4539.8 LED4.2
NetLED6_2: LED6.2 LED7.1 R18.2 | length 383.6
  Top Layer w40: R18.2 3335,4197.6 LED7.1 3335,4534.8 LED6.2
NetLED8_2: LED8.2 LED9.1 R22.2 | length 460.7
  Top Layer w40: R22.2 4385,4185 4500,4300 LED9.1 4500,4524.8 LED8.2
NetLED10_2: LED10.2 LED11.1 R34.2 | length 374.4
  Top Layer w40: LED10.2 4635,4539.8 LED11.1 4635,4197.6 R34.2
NetLED12_2: LED12.2 LED13.1 R36.2 | length 406
  Top Layer w40: R36.2 5805,4232.6 LED13.1 5805,4549.8 LED12.2
NetQ1_1: Q1.1 R7.2 U1.13 | length 1836.6
  Top Layer w20: Q1.1 1610,3457.91 1610,2450 1725,2335 1970,2335 2000,2365 U1.13 2000,2567.6 R7.2
NetQ2_1: Q2.1 R11.2 U2.13 | length 1949.9
  Top Layer w20: Q2.1 2785,3487.91 2785,2845 2730,2790 2730,2420 2835,2315 3135,2315 3150,2330 U2.13 3150,2557.6 R11.2
NetQ3_1: Q3.1 R64.2 U1.15 | length 630
  Top Layer w20: Q3.1 1730,2931.81 1730,2605 1762.4,2572.6 R64.2 1785,2525 1800,2510 1880,2510 1900,2490 U1.15
NetQ4_1: Q4.1 R66.2 U2.15 | length 692.3
  Top Layer w20: Q4.1 2850,2912.91 2850,2610 2882.4,2577.6 R66.2 2905,2530 2935,2500 3020,2500 3050,2470 U2.15
NetQ5_1: Q5.1 R65.2 U1.11 | length 643.7
  Top Layer w20: U1.11 2100,2495 2120,2515 2172.4,2515 R65.2 2267.6,2572.6 2280,2585 2280,2907.91 Q5.1
NetQ6_1: Q6.1 R67.2 U2.11 | length 657.3
  Top Layer w20: U2.11 3250,2495 3280,2525 3320,2525 3350,2555 R67.2 3382.6,2577.6 3405,2600 3405,2902.91 Q6.1
NetQ7_1: Q7.1 R9.2 U1.9 | length 1376.3
  Top Layer w20: U1.9 2268.11,2433.11 v1(2304.05,2469.05) 2340,2505 R9.2 ; Q7.1 2304.45,3450.55 2305,3450 v1(2305,3435)
  Bottom Layer w20: v1(2304.05,2469.05) 2305,2470 2305,3450 v1(2305,3435)
NetQ8_1: Q8.1 R13.2 U2.9 | length 2409
  Top Layer w20: U2.9 3431.89,2408.11 ; v1(3475,2365) 3431.89,2408.11 ; R13.2 3585,2530 3463.11,2408.11 3431.89,2408.11
  Top Layer w30: Q8.1 3444.45,3465.55 v1(3460,3450) ; v1(3595,3455) 3930,3455 3960,3425 3960,2910 3775,2725 3775,2485 v1(3640,2350)
  Bottom Layer w20: v1(3475,2365) 3625,2365 v1(3640,2350)
  Bottom Layer w30: v1(3460,3450) v1@3585,3450
NetQ9_1: Q9.1 R19.2 U3.13 | length 1385.1
  Top Layer w20: v1(3320,2840) 3345,2865 v1(3345,3115)
  Bottom Layer w20: U3.13 3195,2495 3230,2530 3302.4,2530 R19.2 3322.4,2577.6 3295,2605 3295,2815 v1(3320,2840) ; Q9.1 3345,3508.91 v1(3345,3115)
NetQ10_1: Q10.1 R23.2 U4.13 | length 1315.6
  Bottom Layer w20: Q10.1 4640,3447.91 4640,2610 4662.4,2587.6 R23.2 4702.02,2580.57 U4.13
NetQ11_1: Q11.1 R82.2 U3.15 | length 1123.9
  Bottom Layer w15: U3.15 3295,2460 3310,2475 3515,2475 3585,2545 R82.2
  Bottom Layer w20: Q11.1@3256.55,2948.45 Q11.1 3363.91,2855 3555,2855 3640,2770 3640,2590 3622.6,2572.6 R82.2
NetQ12_1: Q12.1 R84.2 U4.15 | length 1018.8
  Top Layer w20: v1(4565,2845) 4570,2840 v1(4685,2840)
  Bottom Layer w20: Q12.1 4565,2892.91 v1(4565,2845) ; v1(4685,2840) 4690,2835 4830,2835 4870,2795 4870,2600 4882.4,2587.6 R84.2 4930,2525 4875,2470 4840,2470 4802.02,2432.02 U4.15
NetQ13_1: Q13.1 R83.2 U3.11 | length 1587.9
  Bottom Layer w20: R83.2 3095,2542.6 U3.11 3095,2345 3140,2300 3690,2300 3775,2385 3775,2890.81 Q13.1
NetQ14_1: Q14.1 R85.2 U4.11 | length 1450.7
  Bottom Layer w20: R85.2 4475,2575 4602.02,2447.98 U4.11 4602.02,2292.98 4625,2270 4950,2270 5115.55,2435.55 Q14.1
NetQ15_1: Q15.1 R21.2 U3.9 | length 3524.9
  Top Layer w30: v1(3600,1745) 3810,1955 v1(3815,1955)
  Bottom Layer w20: R21.2 2905,2480 2976.89,2408.11 U3.9
  Bottom Layer w30: U3.9 2910,2323.11 2910,1945 3110,1745 v1(3600,1745) ; v1@3815,1960 3815,2760 3960,2905 3960,3478.91 Q15.1
NetQ16_1: Q16.1 R25.2 U4.9 | length 4407.6
  Top Layer w30: v1(3940,4115) 4420,4115 4420,4120 v1(4455,4155)
  Bottom Layer w20: R25.2 4250,2400 4296.89,2353.11
  Bottom Layer w30: v1(3940,4115) 3955,4100 3955,3620 4030,3545 4030,2420 4096.89,2353.11 4296.89,2353.11 4490,2353.11 ; v1(4455,4155) 4475,4135 5160,4135 5250,4045 5250,3655 5167.36,3572.36 Q16.1
NetQ17_1: Q17.1 R30.2 U5.13 | length 2535.6
  Top Layer w20: 4315,2255 4620,2255 4655,2290 U5.13 4655,2445 4585,2515 4490,2515 4475,2530 R30.2
  Top Layer w30: Q17.1 4035,3497.91 4020,3482.91 4020,2215 4060,2175 4235,2175 4315,2255
NetQ18_1: Q18.1 R32.2 U6.13 | length 2068.1
  Top Layer w20: R32.2 5740,2563.6 U6.13
  Top Layer w30: Q18.1 5285,3507.91 5285,2370 5405,2250 5715,2250 5740,2275 U6.13
NetQ19_1: Q19.1 R96.2 U5.15 | length 923.1
  Top Layer w20: Q19.1 4185,2891.81 4185,2610 4207.4,2587.6 R96.2 4250,2495 4300,2445 4530,2445 4555,2420 U5.15
NetQ20_1: Q20.1 R98.2 U6.15 | length 731.9
  Top Layer w20: Q20.1 5440,2871.81 5440,2595 5451.4,2583.6 R98.2 5495,2560 5640,2415 U6.15
NetQ21_1: Q21.1 R97.2 U5.11 | length 662.4
  Top Layer w20: Q21.1 4750,2946.81 4750,2620 4717.6,2587.6 R97.2 4695,2550 4755,2490 U5.11
NetQ22_1: Q22.1 R99.2 U6.11 | length 695.4
  Top Layer w20: U6.11 5840,2450 5950,2560 R99.2 5906.4,2583.6 5895,2595 5895,2941.81 Q22.1
NetQ23_1: Q23.1 R31.2 U5.9 | length 2197
  Top Layer w20: Q23.1 4744.45,3470.55 v1(4765,3450) ; 4870,2353.11 U5.9 4855,2445 4930,2520 R31.2
  Top Layer w30: 4870,2353.11 5013.11,2353.11 5240,2580 5240,3410 5200,3450 v1(4950,3450)
  Bottom Layer w20: v1(4765,3450) v1(4950,3450)
NetQ24_1: Q24.1 R33.2 U6.9 | length 1979.2
  Top Layer w20: v2@6063.11,2348.11 6185,2470 R33.2
  Top Layer w30: U6.9@5945,2350 v2@6068.11,2350
  Top Layer w40: v2(5740,3395) 5889.45,3544.45 Q24.1
  Bottom Layer w40: v2(5740,3395) 6250,2885 6250,2535 v2(6070,2355)
NetR1_1: R1.1 U1.1 U1.3 | length 437.5
  Top Layer w20: R1.1@1747.6,2075 1747.6,2152.6 1791.89,2196.89 U1.1 1850,2135 1865,2120 1940,2120 1950,2130 U1.3
NetR2_1: R2.1 U1.5 U1.7 | length 752.1
  Top Layer w20: U1.5 2050,2105 2080,2075 2173.75,2075 ; U1.7 2150,2114 2186.56,2077.44 2173.75,2075 ; 2200,2080 R2.1@2377.6,2080 ; R2.1 2173.75,2075
NetR3_1: R3.1 U2.1 U2.3 | length 372.5
  Top Layer w20: U2.1 3000,2094.74 ; R3.1 3000,2017.6 3000,2094.74 ; U2.3 3100,2105 3080,2085 3009.74,2085 3000,2094.74
NetR4_1: R4.1 U2.5 U2.7 | length 447.7
  Top Layer w20: U2.5 3200,2060 3270,1990 R4.1 3300,2007.6 U2.7
NetR8_1: R8.1 U1.16 | length 284.1
  Top Layer w20: R8.1 1675,2485 1726.89,2433.11 U1.16
NetR12_1: R12.1 U1.14 | length 162.3
  Top Layer w20: R12.1 1950,2517.6 U1.14
NetR14_1: R14.1 U3.1 U3.3 | length 368.4
  Bottom Layer w20: U3.3 3245,2090 3265,2070 3330,2070 ; R14.1 3317.6,2057.6 3330,2070 ; U3.1 3345,2085 3330,2070
NetR15_1: R15.1 U3.5 U3.7 | length 373.8
  Bottom Layer w20: R15.1 3022.6,2057.6 3045,2080 3045,2090 ; U3.7 3045,2090 ; U3.5 3145,2110 3110,2075 3060,2075 3045,2090
NetR16_1: R16.1 U4.1 U4.3 | length 356.7
  Bottom Layer w20: U4.3 4752.02,2047.98 4770,2030 4837.02,2030 4852.02,2045 ; U4.1 4852.02,2045 ; R16.1 4852.02,1950.38 4852.02,2045
NetR17_1: R17.1 U4.5 U4.7 | length 337.6
  Bottom Layer w20: U4.7 4552.02,2042.98 4582.4,2012.6 ; R17.1 4582.4,2020 4625,2020 4652.02,2047.02 U4.5
NetR20_1: R20.1 U1.12 | length 170.7
  Top Layer w20: U1.12 2050,2515 2107.6,2572.6 R20.1
NetR24_1: R24.1 U1.10 | length 518.2
  Top Layer w20: U1.10 2150,2370 2175,2345 2305,2345 2455,2495 R24.1
NetR26_1: R26.1 U5.1 U5.3 | length 416.2
  Top Layer w20: U5.1 4505,1952.6 R26.1 4507.6,2017.6 4515,2025 4585,2025 4605,2045 U5.3
NetR27_1: R27.1 U5.5 U5.7 | length 356.3
  Top Layer w20: U5.5 4705,2040 4725,2020 4795,2020 ; R27.1 4782.6,2007.6 4795,2020 ; U5.7 4805,2030 4795,2020
NetR28_1: R28.1 U6.1 U6.3 | length 359.3
  Top Layer w20: R28.1 5590,1937.4 5590,2040 ; U6.1 5590,2040 ; U6.3 5690,2045 5670,2025 5605,2025 5590,2040
NetR29_1: R29.1 U6.5 U6.7 | length 360.5
  Top Layer w20: U6.5 5790,2045 5810,2025 5870,2025 5890,2045 ; R29.1 5890,1952.4 5890,2045 ; U6.7 5890,2045
NetR35_1: R35.1 U2.16 | length 323.6
  Top Layer w20: R35.1 2795,2495 2881.89,2408.11 U2.16
NetR37_1: R37.1 U2.14 | length 204.7
  Top Layer w20: R37.1 3100,2492.6 U2.14
NetR47_1: R47.1 U2.12 | length 186.1
  Top Layer w20: U2.12 3200,2537.6 R47.1
NetR49_1: R49.1 U2.10 | length 263
  Top Layer w20: U2.10 3300,2475 3315,2490 3405,2490 3465,2550
NetR70_1: R70.1 U3.16 | length 447.2
  Bottom Layer w20: U3.16 3573.11,2408.11 3705,2540 R70.1
NetR71_1: R71.1 U3.14 | length 348.5
  Bottom Layer w15: 3245,2485 3260,2500 3410,2500 3465,2555
  Bottom Layer w20: U3.14 3245,2485 ; 3465,2555 R71.1
NetR72_1: R72.1 U3.12 | length 216.1
  Bottom Layer w20: U3.12 3145,2495 3227.6,2577.6 R72.1
NetR73_1: R73.1 U3.10 | length 181.9
  Bottom Layer w20: R73.1 3045,2547.6 U3.10
NetR74_1: R74.1 U4.16 | length 364.9
  Bottom Layer w20: U4.16 4943.11,2353.11 5050,2460 R74.1
NetR75_1: R75.1 U4.14 | length 253.5
  Bottom Layer w20: U4.14 4752.02,2457.02 4810,2515 R75.1
NetR76_1: R76.1 U4.12 | length 262.3
  Bottom Layer w20: R76.1 4652.02,2520.58 U4.12
NetR77_1: R77.1 U4.10 | length 376.4
  Bottom Layer w20: R77.1 4365,2505 4410,2460 4520,2460 4552.02,2427.98 U4.10
NetR88_1: R88.1 U5.16 | length 504.2
  Top Layer w20: R88.1 4120,2550 4316.89,2353.11 U5.16
NetR89_1: R89.1 U5.14 | length 415.9
  Top Layer w20: R89.1 4365,2530 4415,2480 4555,2480 4605,2430 U5.14
NetR90_1: R90.1 U5.12 | length 284.2
  Top Layer w20: R90.1 4585,2580 4705,2460 U5.12
NetR91_1: R91.1 U5.10 | length 231.6
  Top Layer w20: U5.10 4805,2577.6 R91.1
NetR92_1: R92.1 U6.16 | length 373.1
  Top Layer w20: R92.1 5380,2470 5501.89,2348.11 U6.16
NetR93_1: R93.1 U6.14 | length 269.7
  Top Layer w20: R93.1 5605,2515 5690,2430 U6.14
NetR94_1: R94.1 U6.12 | length 253.1
  Top Layer w20: U6.12 5790,2537.6 R94.1
NetR95_1: R95.1 U6.10 | length 346.3
  Top Layer w20: U6.10 5890,2425 5960,2495 6020,2495 6075,2550 R95.1

## Polygon pours and split planes (outlines as drawn)
GND on Top Layer "Top Layer-No Net" (hatched 90Degree grid 20 track 14, remove dead copper, pour order 4): 1538.58,4660 1543.58,4665 6335,4665 6335,1229.13 6341.57,1222.56 1538.43,1222.56 1538.43,4667.28 1538.58,4667.44
+24V on Bottom Layer "Top Layer-No Net" (hatched 90Degree grid 20 track 14, remove dead copper, pour order 6): 1538.58,4667.44 6341.57,4667.44 6341.57,1222.56 1538.43,1222.56 1538.43,4667.28 1538.58,4667.44

## Keep-outs
Keep-Out Layer:
  circle w10: c6217.56,4529.65 r78.74
  circle w10: c1662.44,4529.65 r78.74
  circle w10: c1662.44,1360.35 r78.74
  circle w10: c6217.56,1360.35 r78.74
  lines w10: 1538.43,1222.56 6341.57,1222.56 6341.57,4667.44 1538.58,4667.44 1538.58,1222.56

## Silkscreen, mask and mechanical layers (free items; w line width, h text height)
Top Overlay:
  circle w10: c1670,4305 r59.06
  circle w10: c6165,4310 r59.06
  circle w10: c1675,1595 r59.06
  circle w10: c6225,1635 r59.06
  lines w10: 1951.81,1222.56 1951.81,1530 5930,1530 5930,1235 ; 1951.81,4660 1951.81,4350 5928.19,4350 5928.19,4668.7

## Text inside footprints (layer, text, board x,y; h text height)
C1: Top Overlay "+" at 2141.1,1860 h31.5 r180
Q1: Top Overlay "G" at 1720,3470.47 h31.5; Top Overlay "D" at 1810,3470.47 h31.5; Top Overlay "S" at 1900,3470.47 h31.5
Q2: Top Overlay "G" at 2870,3475.47 h31.5; Top Overlay "D" at 2960,3475.47 h31.5; Top Overlay "S" at 3050,3475.47 h31.5
Q3: Top Overlay "G" at 1720,2825.47 h31.5; Top Overlay "D" at 1810,2825.47 h31.5; Top Overlay "S" at 1900,2825.47 h31.5
Q4: Top Overlay "G" at 2870,2835.47 h31.5; Top Overlay "D" at 2960,2835.47 h31.5; Top Overlay "S" at 3050,2835.47 h31.5
Q5: Top Overlay "G" at 2300,2830.47 h31.5; Top Overlay "D" at 2390,2830.47 h31.5; Top Overlay "S" at 2480,2830.47 h31.5
Q6: Top Overlay "G" at 3435,2835.47 h31.5; Top Overlay "D" at 3525,2835.47 h31.5; Top Overlay "S" at 3615,2835.47 h31.5
Q7: Top Overlay "G" at 2295,3470.47 h31.5; Top Overlay "D" at 2385,3470.47 h31.5; Top Overlay "S" at 2475,3470.47 h31.5
Q8: Top Overlay "G" at 3435,3475.47 h31.5; Top Overlay "D" at 3525,3475.47 h31.5; Top Overlay "S" at 3615,3475.47 h31.5
Q9: Bottom Overlay "G" at 3271,3485.47 h31.5; Bottom Overlay "D" at 3181,3485.47 h31.5; Bottom Overlay "S" at 3091,3485.47 h31.5
Q10: Bottom Overlay "G" at 4525,3465.47 h31.5; Bottom Overlay "D" at 4435,3465.47 h31.5; Bottom Overlay "S" at 4345,3465.47 h31.5
Q11: Bottom Overlay "G" at 3266,2855.47 h31.5; Bottom Overlay "D" at 3176,2855.47 h31.5; Bottom Overlay "S" at 3086,2855.47 h31.5
Q12: Bottom Overlay "G" at 4520,2840.47 h31.5; Bottom Overlay "D" at 4430,2840.47 h31.5; Bottom Overlay "S" at 4340,2840.47 h31.5
Q13: Bottom Overlay "G" at 3856,2855.47 h31.5; Bottom Overlay "D" at 3766,2855.47 h31.5; Bottom Overlay "S" at 3676,2855.47 h31.5
Q14: Bottom Overlay "G" at 5125,2840.47 h31.5; Bottom Overlay "D" at 5035,2840.47 h31.5; Bottom Overlay "S" at 4945,2840.47 h31.5
Q15: Bottom Overlay "G" at 3856,3485.47 h31.5; Bottom Overlay "D" at 3766,3485.47 h31.5; Bottom Overlay "S" at 3676,3485.47 h31.5
Q16: Bottom Overlay "G" at 5125,3465.47 h31.5; Bottom Overlay "D" at 5035,3465.47 h31.5; Bottom Overlay "S" at 4945,3465.47 h31.5
Q17: Top Overlay "G" at 4110,3475.47 h31.5; Top Overlay "D" at 4200,3475.47 h31.5; Top Overlay "S" at 4290,3475.47 h31.5
Q18: Top Overlay "G" at 5345,3470.47 h31.5; Top Overlay "D" at 5435,3470.47 h31.5; Top Overlay "S" at 5525,3470.47 h31.5
Q19: Top Overlay "G" at 4125,2835.47 h31.5; Top Overlay "D" at 4215,2835.47 h31.5; Top Overlay "S" at 4305,2835.47 h31.5
Q20: Top Overlay "G" at 5360,2835.47 h31.5; Top Overlay "D" at 5450,2835.47 h31.5; Top Overlay "S" at 5540,2835.47 h31.5
Q21: Top Overlay "G" at 4735,2845.47 h31.5; Top Overlay "D" at 4825,2845.47 h31.5; Top Overlay "S" at 4915,2845.47 h31.5
Q22: Top Overlay "G" at 5880,2840.47 h31.5; Top Overlay "D" at 5970,2840.47 h31.5; Top Overlay "S" at 6060,2840.47 h31.5
Q23: Top Overlay "G" at 4735,3465.47 h31.5; Top Overlay "D" at 4825,3465.47 h31.5; Top Overlay "S" at 4915,3465.47 h31.5
Q24: Top Overlay "G" at 5880,3470.47 h31.5; Top Overlay "D" at 5970,3470.47 h31.5; Top Overlay "S" at 6060,3470.47 h31.5